# Altium PCB Adafruit BNO055 STEMMA QT.PcbDoc
Units mil, origin at the board's own origin, x right, y up, seen from the top; angles counter-clockwise.
Board outline 1000 x 800 mil, 2 copper layers (Top, Bottom); 30 components, 17 nets, 105 pads, 31 vias.
Unrouted connection lines stored in the file: 2.
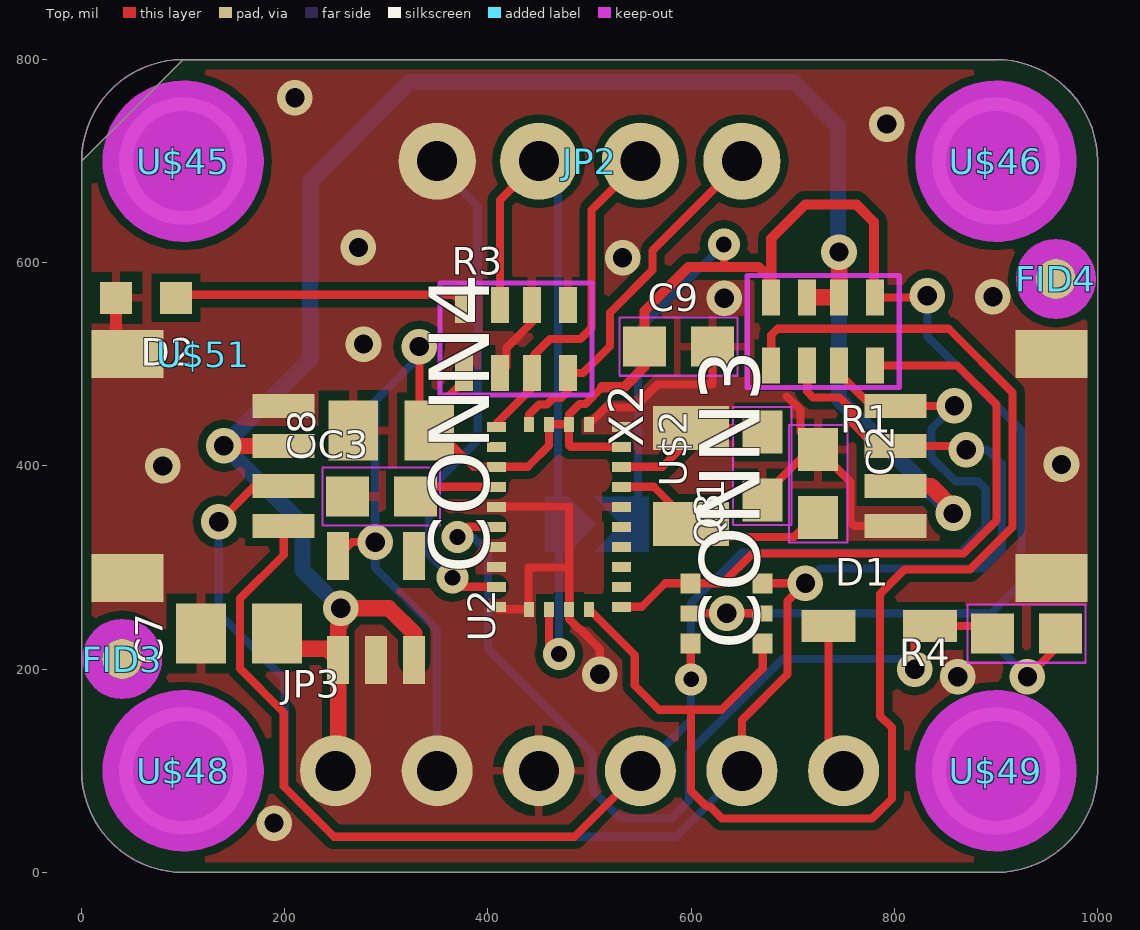
[diagram p0: Top view]
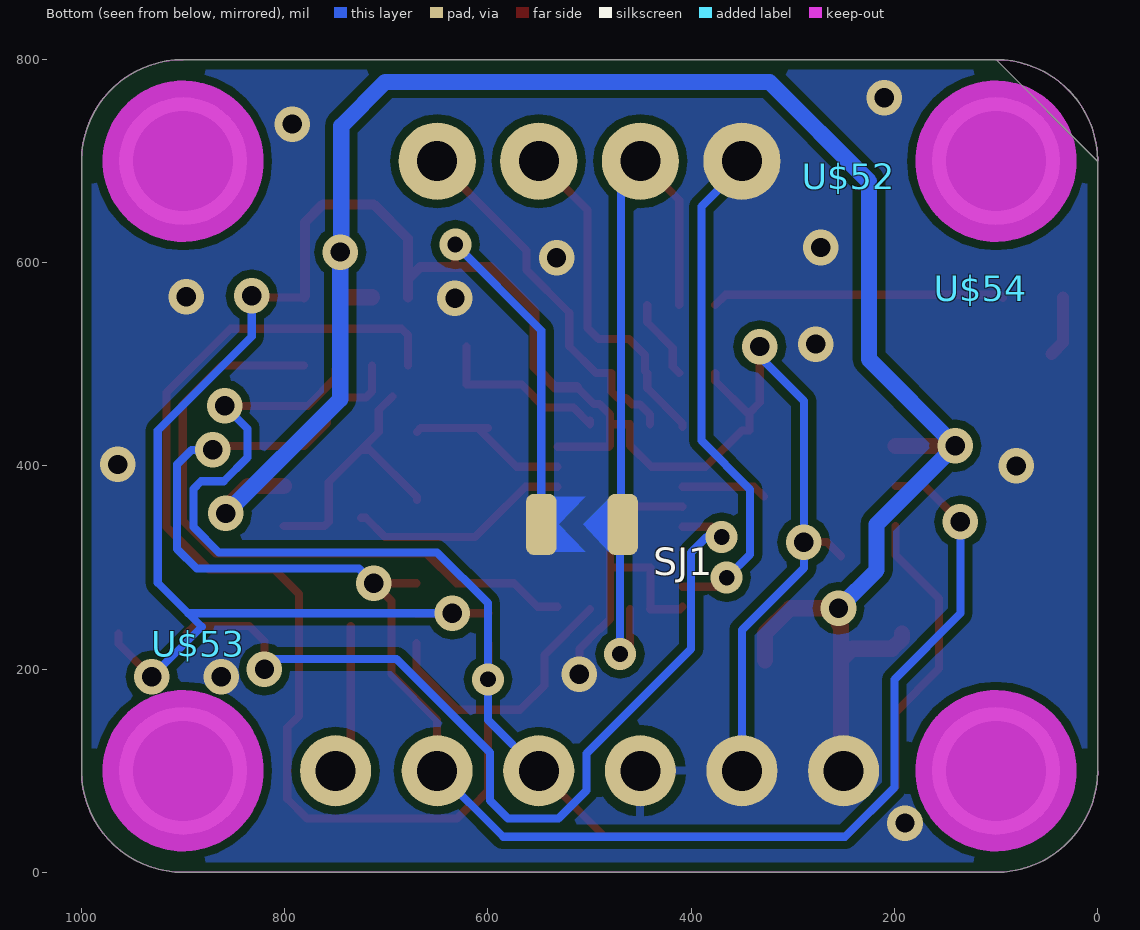
[diagram p1: Bottom view, seen from below]

## Layer stack, top to bottom
Top Solder: solder mask 0.4, Solder Resist, Dk 3.5
Top: signal copper 1.378
Dielectric 1: dielectric 12.6, FR-4, Dk 4.8
Bottom: signal copper 1.378
Bottom Solder: solder mask 0.4, Solder Resist, Dk 3.5

## Board outline
100,800 ccw(c100,700) 0,700 0,100 ccw(c100,100) 100,0 900,0 ccw(c900,100) 1000,100 1000,700 ccw(c900,700) 900,800 100,800 ccw(c100,700)

## Design rules (kind name [scope] priority, off if disabled: settings)
BoardOutlineClearance mdCopperDimension [All] p1: gap=10 ignorepadtopadclearanceinfootprint=FALSE except(0: Arc-SplitContinuation Track-SplitContinuation SMDPad-SplitContinuation THPad-SplitContinuation Via-SplitContinuation Fill-SplitContinuation Poly-SplitContinuation Region-SplitContinuation Text-SplitContinuation)
Clearance "Clearance (Same Net)" [All] p1: gap=8 ignorepadtopadclearanceinfootprint=FALSE
Clearance [All] p2: gap=8 ignorepadtopadclearanceinfootprint=FALSE
HoleSize HoleSize_For_NetClass_lowpower [InNetClass('lowpower')] p1: absolutevalues=TRUE maxlimit=19 minlimit=19 maxpercent=80.000 minpercent=20.000
HoleSize HoleSize_For_NetClass_highpower [InNetClass('highpower')] p2: absolutevalues=TRUE maxlimit=19 minlimit=19 maxpercent=80.000 minpercent=20.000
HoleSize [All] p3: absolutevalues=TRUE maxlimit=100000 minlimit=15.5 maxpercent=80.000 minpercent=20.000
HoleToHoleClearance mdDrill [All] p1: gap=8 allowstackedmicrovias=TRUE
MinimumSolderMaskSliver [All] p1 off: minsoldermaskwidth=10
PasteMaskExpansion Expansion_SMDPaste_OFF [InPadClass('SMDPaste_OFF')] p1: expansion=0
PasteMaskExpansion mlMinCreamFrame [All] p2: expansion=0
PolygonConnect PolygonConnect_For_PolygonThermal_ON_Width100000_Gap100000 [InPolygonClass('PolygonThermal_ON_Width100000_Gap100000') vs Not IsVia] p1: connectstyle=Relief reliefconductorwidth=10 reliefentries=4 polygonreliefangle="90 Angle" airgapwidth=10
PolygonConnect PolygonConnect_For_PolygonThermal_ON_Width80000_Gap100000 [InPolygonClass('PolygonThermal_ON_Width80000_Gap100000') vs Not IsVia] p2: connectstyle=Relief reliefconductorwidth=8 reliefentries=4 polygonreliefangle="90 Angle" airgapwidth=10
PolygonConnect ThermalVias [IsVia] p3: connectstyle=Direct reliefconductorwidth=10 reliefentries=4 polygonreliefangle="90 Angle" airgapwidth=10
PolygonConnect [All] p4: connectstyle=Relief reliefconductorwidth=10 reliefentries=4 polygonreliefangle="90 Angle" airgapwidth=10
RoutingVias [All] p1: holewidth=15.5 width=31.5 viastyle="Through Hole" minholewidth=15.5 minwidth=31.5 maxholewidth=100 maxwidth=100
SolderMaskExpansion Expansion_SMDSolder_OFF [InPadClass('SMDSolder_OFF')] p1: expansion=0 istentingtop=FALSE
SolderMaskExpansion mlMinStopFrame [All] p2: expansion=2 istentingtop=FALSE
Width Width_For_NetClass_lowpower [InNetClass('lowpower')] p1: maxlimit=24 minlimit=10 preferedwidth=12
Width Width_For_NetClass_highpower [InNetClass('highpower')] p2: maxlimit=32 minlimit=10 preferedwidth=16
Width [All] p3: maxlimit=10000 minlimit=8 preferedwidth=8
26 further rules are at their usual default settings.

## Classes and differential pairs
polygon class PolygonThermal_ON_Width80000_Gap100000: Polygon_1_Net_GND Polygon_2_Net_GND
pad class SMDSolder_OFF: SJ1-1 SJ1-2
pad class SMDPaste_OFF: FID3-1 FID4-1 SJ1-1 SJ1-2
net class highpower: VCC

## Components (designator, comment, footprint, x,y, rotation, side; value= is the part's Value field where it differs from the comment)
C1 "22pF" 0603-NO 670,400 r90 top
C2 "22pF" 0603-NO 725,382.5 r270 top
C3 "0.1uF" 0603-NO 295,370 r0 top
C7 "10uF" 0805-NO 155,235 r180 top
C8 "10uF" 0805-NO 305,435 r180 top
C9 "0.1uF" 0603-NO 587.5,517.5 r0 top
CONN3 "" JST_SH4 900,400 r90 top
CONN4 "" JST_SH4 100,400 r270 top
D1 "1n4148" SOD-323 785,242.5 r0 top
D2 "GREEN" CHIPLED_0603_NOOUTLINE 63.5,565.5 r90 top
FID3 "" FIDUCIAL_1MM 40,210 r0 top
FID4 "" FIDUCIAL_1MM 959,584 r0 top
JP2 "" 1X04_ROUND_76 500,700 r0 top
JP3 "" 1X06_ROUND_70 500,100 r0 top
Q3 "BSS138" SOT363 635,255 r90 top
R1 "10K" RESPACK_4X0603 730,532.5 r180 top
R3 "10K" RESPACK_4X0603 427.5,525 r0 top
R4 "10K" 0603-NO 930,235 r180 top
SJ1 "" SOLDERJUMPER_ARROW_NOPASTE 507.5,342.5 r0 bottom
U2 "AP2112K-3.3" SOT23-5 290,260 r0 top
U$2 "BNO055" BNO055 470,350 r270 top
U$45 "" MOUNTINGHOLE_2.5_PLATED 100,700 r0 top
U$46 "" MOUNTINGHOLE_2.5_PLATED 900,700 r0 top
U$48 "" MOUNTINGHOLE_2.5_PLATED 100,100 r0 top
U$49 "" MOUNTINGHOLE_2.5_PLATED 900,100 r0 top
U$51 "" ADAFRUIT_3.5MM 120,510 r0 top
U$52 "" PCBFEAT-REV-040 245,685 r180 bottom
U$53 "" STEMMAQT 885,225 r90 bottom
U$54 "" STEMMAQT 115,575 r270 bottom
X2 "32.768" XTAL3215 600,390 r270 top

## Footprints (in the part's own frame and the unit in brackets; to place one, negate y for a bottom-side part, rotate by r counter-clockwise, add the part's x,y. Pads: shape width x height; smd on the part's side, far side on the other; paste and mask are expansions set on the pad)
1X04_ROUND_76 [mil] "1X04_ROUND_76"
  round 76 hole 39.37: 1(-150,0) 2(-50,0) 3(50,0) 4(150,0)
  body extent -204,-38 188,38, height 150
1X06_ROUND_70 [mil] "1X06_ROUND_70"
  round 70 hole 39.37: 1(-250,0) 2(-150,0) 3(-50,0) 4(50,0) 5(150,0) 6(250,0)
  body extent -304,-35 285,35, height 150
0603-NO [mm] "0603-NO"
  rect 1.075x1 smd: 1(-0.85,0) 2(0.85,0)
  Top keep-out lines w0.051: -1.473,0.729 -1.473,-0.729 1.473,-0.729 1.473,0.729 -1.473,0.729
  body extent -1.5,-0.76 1.5,0.76, height 3.81
0805-NO [mil] "0805-NO"
  rect 48.82x59.06 smd: 1(-37.4,0) 2(37.4,0)
  body extent -62,-30 62,30, height 150
ADAFRUIT_3.5MM [mil] "ADAFRUIT_3.5MM"
BNO055 [mil] "BNO055"
  rect 9.84x18.7 smd: 1(-88.58,61.52) 6(-88.58,-61.52) 7(-68.9,-61.52) 8(-49.21,-61.52) 9(-29.53,-61.52) 10(-9.84,-61.52) 11(9.84,-61.52) 12(29.53,-61.52) 13(49.21,-61.52) 14(68.9,-61.52) 15(88.58,-61.52) 20(88.58,61.52) 21(68.9,61.52) 22(49.21,61.52) 23(29.53,61.52) 24(9.84,61.52) 25(-9.84,61.52) 26(-29.53,61.52) 27(-49.21,61.52) 28(-68.9,61.52)
  rect 14.76x9.84 smd: 2(-91.04,29.53) 3(-91.04,9.84) 4(-91.04,-9.84) 5(-91.04,-29.53) 16(91.04,-29.53) 17(91.04,-9.84) 18(91.04,9.84) 19(91.04,29.53)
  body extent -105,-78 105,78, height 150
CHIPLED_0603_NOOUTLINE [mil] "CHIPLED_0603_NOOUTLINE"
  rect 31.5x31.5 smd: A(0,-29.53) C(0,29.53)
  body extent -18,-45 18,45, height 150
FIDUCIAL_1MM [mm] "FIDUCIAL_1MM"
  rrect100% 1x1 smd paste+0: 1(0,0)
  Top keep-out lines w0.5: -0.75,0 ccw(c0,0) 0,-0.75 ; -0.75,0 cw(c0,0) 0,0.75 ; -0.75,0 ccw(c0,0) 0,-0.75 ; -0.75,0 cw(c0,0) 0,0.75 ; 0,-0.75 ccw(c0,0) 0.75,0 ; 0,-0.75 ccw(c0,0) 0.75,0 ; 0,0.75 cw(c0,0) 0.75,0 ; 0,0.75 cw(c0,0) 0.75,0
  body extent -1.01,-1.01 1.01,1.01, height 3.81
JST_SH4 [mil] "JST_SH4"
  rect 23.62x61.02 smd: 1(-59.06,98.98) 2(-19.69,98.98) 3(19.69,98.98) 4(59.06,98.98)
  rect 47.24x70.87 smd: MT1(-110.24,-54.57) MT2(110.24,-54.57)
  body extent -134,-90 134,129, height 150
MOUNTINGHOLE_2.5_PLATED [mil] "MOUNTINGHOLE_2.5_PLATED"
  round 125.98 hole 98.43: P$1(0,0)
  Top keep-out circle w80: c0,0 r39.37
  Top keep-out circle w80: c0,0 r39.37
  Bottom keep-out circle w80: c0,0 r39.37
  Bottom keep-out circle w80: c0,0 r39.37
  body extent -80,-80 80,80, height 150
PCBFEAT-REV-040 [mil] "PCBFEAT-REV-040"
RESPACK_4X0603 [mil] "RESPACK_4X0603"
  rect 17.72x35.43 smd: 1(-51.18,-33.46) 2(-15.75,-33.46) 3(15.75,-33.46) 4(51.18,-33.46) 5(51.18,33.46) 6(15.75,33.46) 7(-15.75,33.46) 8(-51.18,33.46)
  Top keep-out lines w5: 74.8,55.12 74.8,-55.12 -74.8,-55.12 -74.8,55.12 74.8,55.12
  body extent -78,-58 78,58, height 150
SOD-323 [mil] "SOD-323"
  rect 53.15x31.5 smd: A(50,0) C(-50,0)
  body extent -77,-32 77,32, height 150
SOLDERJUMPER_ARROW_NOPASTE [mil] "SOLDERJUMPER_ARROW_NOPASTE"
  rrect50% 30x60 smd paste+0 mask+0: 1(-40,0) 2(40,0)
  Top region: -3.03,27.03 23,0 -3.03,-27.03 50.91,-27.03 50.91,27.03 -3.03,27.03
  Top region: -50.91,27.03 -26.44,27.03 -1.37,0 -28.41,-27.03 -50.91,-27.03 -50.91,27.03
  body extent -58,-32 58,32, height 150
SOT23-5 [mil] "SOT23-5"
  rect 21.65x47.24 smd: 1(-37.4,-51.19) 2(0,-51.19) 3(37.4,-51.19) 4(37.4,51.19) 5(-37.4,51.19)
  body extent -60,-75 60,75, height 150
SOT363 [mil] "SOT363"
  rect 19.69x19.69 smd: 1(-29.53,-35.43) 3(29.53,-35.43) 4(29.53,35.43) 6(-29.53,35.43)
  rect 15.75x19.69 smd: 2(0,-35.43) 5(0,35.43)
  body extent -44,-45 44,45, height 150
STEMMAQT [mil] "STEMMAQT"
XTAL3215 [mil] "XTAL3215"
  rect 43.31x74.8 smd: P$1(47.24,0) P$2(-47.24,0)
  body extent -69,-37 69,37, height 50

## Part data
C1 C2 C3 C9 R4: library part 0603-NO, PackageName=0603-NO
C7 C8: library part 0805-NO, PackageName=0805-NO
CONN3 CONN4: library part JST_SH4, PackageName=JST_SH4
D1: library part SOD-323, PackageName=SOD-323
D2: library part CHIPLED_0603_NOOUTLINE, PackageName=CHIPLED_0603_NOOUTLINE
FID3 FID4: library part FIDUCIAL_1MM, PackageName=FIDUCIAL_1MM
JP2: library part 1X04_ROUND_76, PackageName=1X04_ROUND_76
JP3: library part 1X06_ROUND_70, PackageName=1X06_ROUND_70
Q3: library part SOT363, PackageName=SOT363
R1 R3: library part RESPACK_4X0603, PackageName=RESPACK_4X0603
SJ1: library part SOLDERJUMPER_ARROW_NOPASTE, PackageName=SOLDERJUMPER_ARROW_NOPASTE
U2: library part SOT23-5, PackageName=SOT23-5
U$45 U$46 U$48 U$49: library part MOUNTINGHOLE_2.5_PLATED, PackageName=MOUNTINGHOLE_2.5_PLATED
U$51: library part ADAFRUIT_3.5MM, PackageName=ADAFRUIT_3.5MM
U$52: library part PCBFEAT-REV-040, PackageName=PCBFEAT-REV-040
U$53 U$54: library part STEMMAQT, PackageName=STEMMAQT
X2: library part XTAL3215, PackageName=XTAL3215
U$2: PackageName=BNO055

## Via types
v1: diameter 35/35 (per signal layer), hole 19, Top to Bottom, 26 vias
v2: diameter 31.5/31.5 (per signal layer), hole 15.5, Top to Bottom, 5 vias

## Nets (pads, with @x,y where several pads share a name; then routed paths per layer and width w, separated by ;. In a path a pad name is that pad's centre, name@x,y a point inside that pad or via, vN(x,y) a via of type N, cw(c..) or ccw(c..) an arc to the next point about the centre after c; other vN are vias at no path point)
3.3V: C8.1 C9.1 JP3.2 Q3.2 Q3.5 R1.1 R1.4 R3.1 R4.1 SJ1.2 U2.5 U$2.3 U$2.4 U$2.8 U$2.28 | length 2715.2
  Top w8: U2.5 266.41,325 v1(289.07,325) ; v1(332.5,517.5) 332.5,462.5 C8.1@343.7,451.3 ; R3.1 376.32,483.92 C8.1@343.7,451.3 ; 512.5,477.5 495.87,460.87 490.08,460.87 479.84,450.63 U$2.3 U$2.3@479.84,440 ; U$2.28 481.1,418.9 479.84,420.16 U$2.3@479.84,440 ; Q3.5 v1(635,255) Q3.2 ; v2(632.12,617.88) 632.5,617.5 632.5,595.96 ; R1.1 830.96,565.96 v1(832.5,567.5) ; v1(931,192.5) 963.46,224.96 R4.1 ; C8.1@343.7,451.3 342.4,450 C8.1 350,435 385.79,399.21 U$2.8 439.21,399.21 460.16,420.16 U$2.4 478.8,441.04 U$2.3@479.84,440
  Top w10: 512.5,477.5 534.04,477.5 554.04,497.5 C9.1 554.04,552.5 597.5,595.96 632.5,595.96 666.32,595.96 678.82,583.46 R1.4 678.82,623.82 712.5,657.5 762.5,657.5 780,640 780,567.15 R1.1
  Bottom w8: v1(332.5,517.5) 342.5,517.5 289.07,464.07 v1(289.07,325) 289.07,299.5 350,238.57 JP3.2 ; SJ1.2 547.5,533.26 v2(632.12,617.88) ; v1(635,255) 895,255 ; v1(832.5,567.5) 832.5,527.5 925,435 925,285 895,255 ; v1(931,192.5) 881.75,241.75 895,255
GND: C1.1 C2.1 C3.1 C7.2 C8.2 C9.2 CONN3.1 CONN3.MT1 CONN3.MT2 CONN4.1 CONN4.MT1 CONN4.MT2 D2.C JP3.3 R3.2 R3.5 R3.6 U2.2 U$2.2 U$2.10 U$2.15 U$2.16 U$2.18 U$2.25 | length 955.2
  Top w8: U$2.15 410.94,258.96 U$2.16 440,259.43 440,300 480,300 ; U$2.10 408.64,360 480,360 480,300 ; R3.2 418.08,497.86 418.08,516.25 443.25,541.42 R3.6 ; U$2.2@499.53,444.87 U$2.2 515.98,457.5 544.23,457.5 566.73,480 620.96,480 C9.2 ; v1(510,195) 510,220 490.43,239.57 489.64,239.57 479.84,249.37 U$2.18 480,259.11 480,300 ; C1.1 670,369.35 716.61,415.96 C2.1 ; 694.1,468.4 707.5,455 707.5,433.46 C2.1 ; CONN3.1 760.74,340.94 756.68,345 756.68,384.28 C2.1
  Top w12: D2.C 33.97,521.7 CONN4.MT1
  other v1: 189.5,48.5 862.5,192.5 80,400 964.5,401.5 277.5,520 632.5,565 897,566.5 532.5,605 272.5,615 792.5,736.5 210,762.5
I2CADDR_3V: JP2.2 R3.7 SJ1.1 U$2.17 | length 700.8
  Top w8: R3.7 411.75,661.75 JP2.2 ; U$2.17 460.16,224.84 v2(470,215)
  Bottom w8: JP2.2 469,681 469,667 469,654.5 SJ1.1@469,342.5 ; SJ1.1 SJ1.1@469,342.5 ; v2(470,215) 470,342.5 SJ1.1@469,342.5
INT_3V: JP2.1 U$2.14 | length 503.1
  Top w8: v2(365,290) 373.9,281.1 U$2.14
  Bottom w8: JP2.1 350,695.5 390,655.5 390,425 342,377 342,313 v2(365,290)
N$1: C1.2 U$2.27 X2.P$2 | length 165.8
  Top w8: U$2.27 571.97,399.21 X2.P$2@610,437.24 ; X2.P$2 X2.P$2@610,437.24 ; C1.2 666.22,437.24 X2.P$2@610,437.24
N$2: C2.2 U$2.26 X2.P$1 | length 221.9
  Top w8: U$2.26 563.23,379.53 X2.P$1 612.76,330 701.28,330 720.32,349.04 C2.2
N$3: C3.2 U$2.9 | length 84
  Top w8: C3.2 337.99,379.53 U$2.9
N$4: D2.A R3.8 | length 288.7
  Top w8: D2.A 95.99,568.46 366.32,568.46 R3.8
NRESET_3V: D1.A R4.2 U$2.11 | length 894.7
  Top w8: v2(370,330) 380.16,340.16 U$2.11 ; v1(820,200) 820,227.5 D1.A 889.04,242.5 R4.2
  Bottom w8: v2(370,330) 385,330 400,315 400,220 503,117 503,80.53 530.53,53 580.37,53 598,70.63 598,118 690,210 810,210 v1(820,200)
PS0_3V: JP2.3 R3.3 U$2.6 | length 337.7
  Top w8: U$2.6 408.48,441.77 443.25,476.54 R3.3 445.32,493.61 445.32,509.22 461.1,525 491.26,525 502.04,535.78 502.04,652.04 JP2.3
PS1_3V: JP2.4 R3.4 U$2.5 | length 363.6
  Top w8: U$2.5 440.47,450.63 450.27,460.43 457.93,460.43 464.32,466.82 472.08,466.82 478.68,473.42 R3.4 493.68,491.54 520,517.85 520,550.78 562,592.78 562,612 JP2.4
RESET: D1.C JP3.6 | length 148.7
  Top w8: D1.C 735,115 JP3.6
SCL: CONN3.4 CONN4.4 JP3.4 Q3.6 R1.7 | length 1531.6
  Top w8: CONN4.4 198.98,312.48 155.99,269.5 155.99,200.5 198.98,157.52 198.98,84.56 248.53,35 485,35 JP3.4 ; Q3.6 599.57,190.43 v2(600,190) ; R1.7 750,494.78 750,486.41 777.35,459.06 CONN3.4 v1(859.14,459.14) v1(859.14,459.14)
  Bottom w8: JP3.4 600,150 v2(600,190) 600,265 650,315 865,315 890,340 890,377.5 882.5,385 860,385 836.64,408.36 836.64,436.64 v1(859.14,459.14)
SCL_3V: Q3.1 R1.5 U$2.19 | length 1360.2
  Top w8: U$2.19 544.53,213.96 544.53,183.96 568.48,160 600,160 ; Q3.1 670.43,200.47 629.96,160 600,160 ; R1.5 678.82,528.82 685,535 853.57,535 916.36,472.21 916.36,339.77 874.59,298 810,298 786,274 786,154 797.5,142.5 797.5,72.5 778,53 630.53,53 618.53,65 615,65 600,80 600,160
SDA: CONN3.3 CONN4.3 JP3.5 Q3.3 R1.6 | length 1662.1
  Top w8: v1(135,345) 170.32,380.32 CONN4.3 ; JP3.5 650,150 695,195 695,267 v1(712.5,284.5) v1@695.5,284.5 ; Q3.3 v1@695.47,284.53 ; R1.6 714.25,473.25 720,467.5 746.28,467.5 758.51,455.27 758.51,442.27 781.1,419.69 CONN3.3 867.03,419.69 v1(870.86,415.86)
  Bottom w8: v1(135,345) 135,255 200,190 200,83.53 248.53,35 585,35 JP3.5 ; v1(712.5,284.5) 727,299 886.63,299 906,318.37 906,401.63 891.77,415.86 v1(870.86,415.86)
SDA_3V: Q3.4 R1.8 U$2.20 | length 653.3
  Top w8: U$2.20 551.42,261.42 574.53,284.53 Q3.4 631.03,284.53 660.5,314 867.96,314 900.36,346.4 900.36,460.58 861.9,499.04 R1.8
VCC: C7.1 CONN3.2 CONN4.2 JP3.1 R1.2 R1.3 U2.1 U2.3 | length 2060.7
  Top w16: v1(140,420) 140.32,419.69 CONN4.2 ; C7.1 192.4,230 202.4,220 241.41,220 U2.1 ; JP3.1 252.6,102.6 U2.1 ; U2.3 327.4,235.1 302.5,260 v1(255,260) 255,245 252.6,242.6 U2.1 ; R1.3 R1.2 745.75,610.25 v1(745.5,610.5) ; CONN3.2 836.02,380.32 858,358.34 v1(858,353.26)
  Bottom w16: v1(255,260) 217.5,297.5 217.5,342.5 v1(140,420) 225,505 225,680 323,778 701,778 744.5,734.5 744.5,611.5 v1(745.5,610.5) 745.5,465.76 v1(858,353.26)
pads on no net: FID3.1 FID4.1 U2.4 U$2.1 U$2.7 U$2.12 U$2.13 U$2.21 U$2.22 U$2.23 U$2.24 U$45.P$1 U$46.P$1 U$48.P$1 U$49.P$1

## Polygon pours and split planes (outlines as drawn)
GND on Top "Polygon_1_Net_GND" (solid, remove dead copper, pour order 2): -4,804 -4,-4 1004,-4 1004,804
GND on Bottom "Polygon_2_Net_GND" (solid, remove dead copper, pour order 3): -4,804 -4,-4 1004,-4 1004,804
no net on tPlace "Polygon_2_NoNet" (solid, pour order 0): 749.84,685.04 729.84,685.04 729.84,710.04 714.84,710.04 739.84,743.37 764.84,710.04 749.84,710.04
no net on tPlace "Polygon_1_NoNet" (solid, pour order 1): 785.16,629.96 785.16,649.96 810.16,649.96 810.16,664.96 843.49,639.96 810.16,614.96 810.16,629.96

## Keep-outs
Keep-Out Layer:
  the board outline again, w0

## Silkscreen, mask and mechanical layers (free items; w line width, h text height)
Dimension:
  the board outline again, w0
tPlace:
  lines w10: 695.16,639.96 cw(c740.16,639.96) 740.16,684.96 cw(c740.93,640.73) 785.16,639.96 cw(c740.16,639.96) 740.16,594.96 cw(c740.16,639.96) 695.16,639.96
  text "INT" at 328.77,747.53 h27.2
  text "ADR" at 425.83,748.14 h27.2
  text "PS0" at 525.28,748.14 h27.2
  text "PS1" at 634.81,748.14 h27.2
  text "Y" at 769.34,727.47 h42.5
  text "Z" at 722.34,619.54 h42.5
  text "on" at 17.5,587.5 h34
  text "BNO-055" at 303.32,587.96 h49.3
  text "X" at 814.84,567.54 h42.5
  text "3V" at 316.92,138.25 h34
  text "SCL" at 504.92,138.25 h34
  text "RST" at 704.92,138.25 h34
  text "VIN" at 202.75,13.25 h34
  text "GND" at 399.92,13.25 h34
  text "SDA" at 604.92,13.25 h34
bPlace:
  text "This side 3V logic" at 792.99,743.93 h34
  text "BNO055" at 640.53,575.5 h47.6
  text "9-DoF Accel+Gyro+Mag" at 835.47,513.93 h34
  text "w/Quaternion, Euler" at 809.98,453.93 h34
  text "Heading. I2Caddr 0x28" at 846.8,393.93 h34
  text "0x29" at 716.39,321.43 h34
  text "Vin/I2C/RST:3-5V" at 761.83,8.93 h34

## Dimensions
53.5,100 to 152,100 on tFinish
53.5,700.5 to 53.5,100 on tFinish
100.5,749.5 to 900,749.5 on tFinish
0,800 to 0,0 on tFinish
1000,800 to 0,800 on tFinish

## Text inside footprints (layer, text, board x,y; h text height)
CONN3: Top Value "JST SH 4" at 1057.72,268.9 h34 r90
CONN4: Top Value "JST SH 4" at -57.72,531.1 h34 r270
U$52: tPlace ">REV" at 259,665 h34